# Altium PCB HeadController_1.PcbDoc
Units mm, origin at the board's own origin, x right, y up, seen from the top; angles counter-clockwise.
Board outline 67.02 x 26.21 mm, 2 copper layers (Top Layer, Bottom Layer), stack 1.051 mm thick; 73 components, 53 nets, 280 pads, 57 vias.
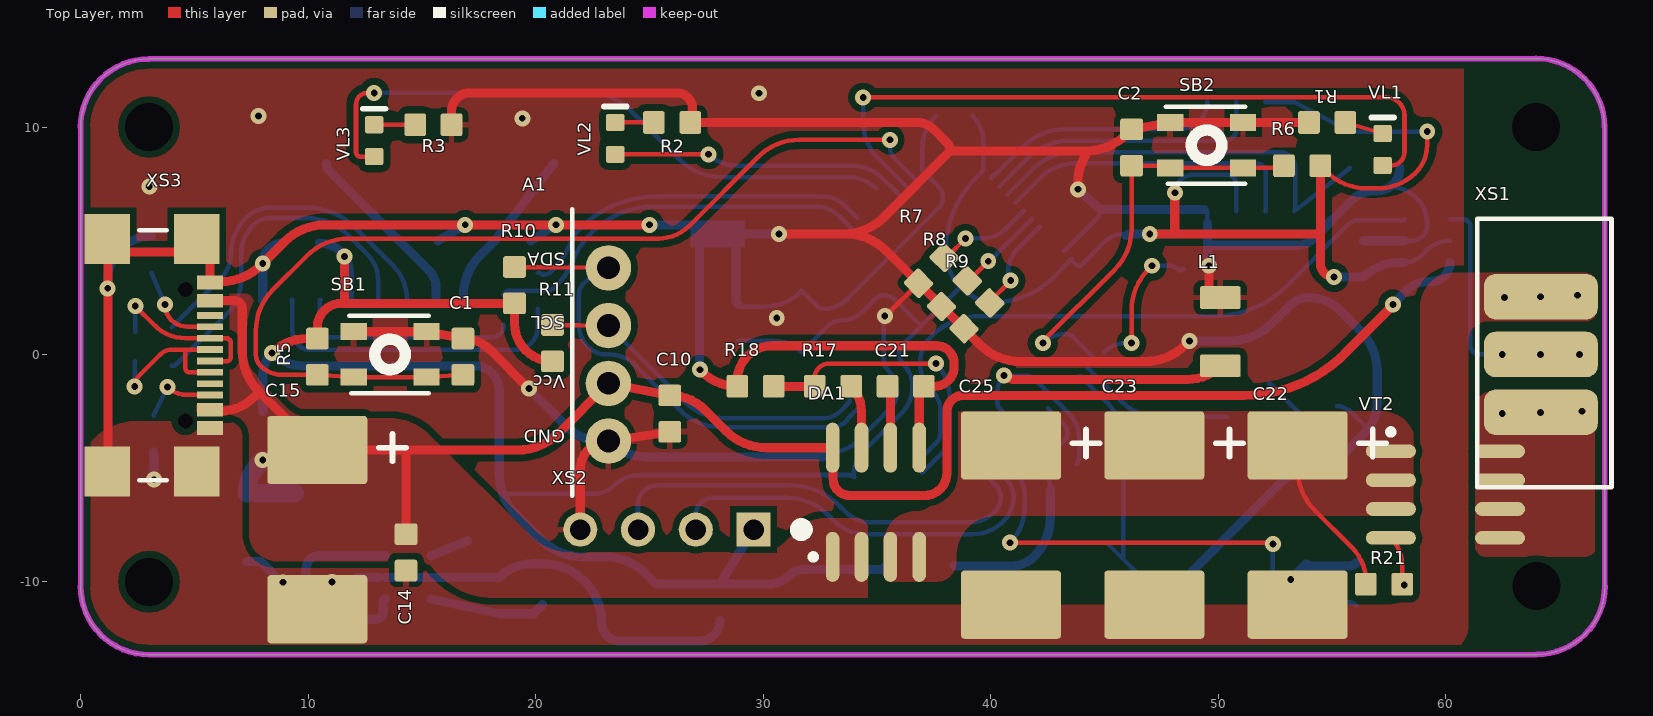
[diagram p0: Top Layer view]
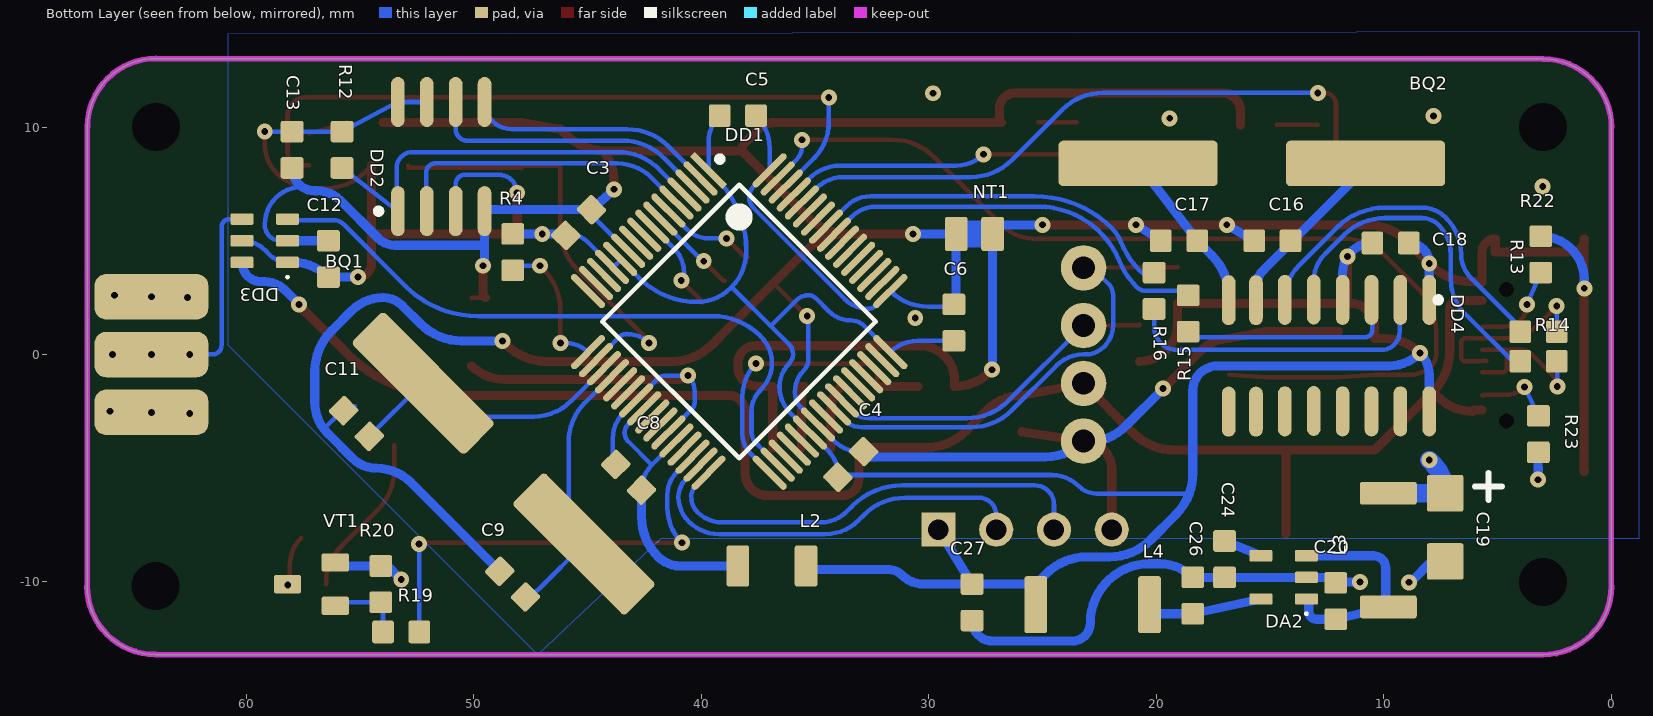
[diagram p1: Bottom Layer view, seen from below]
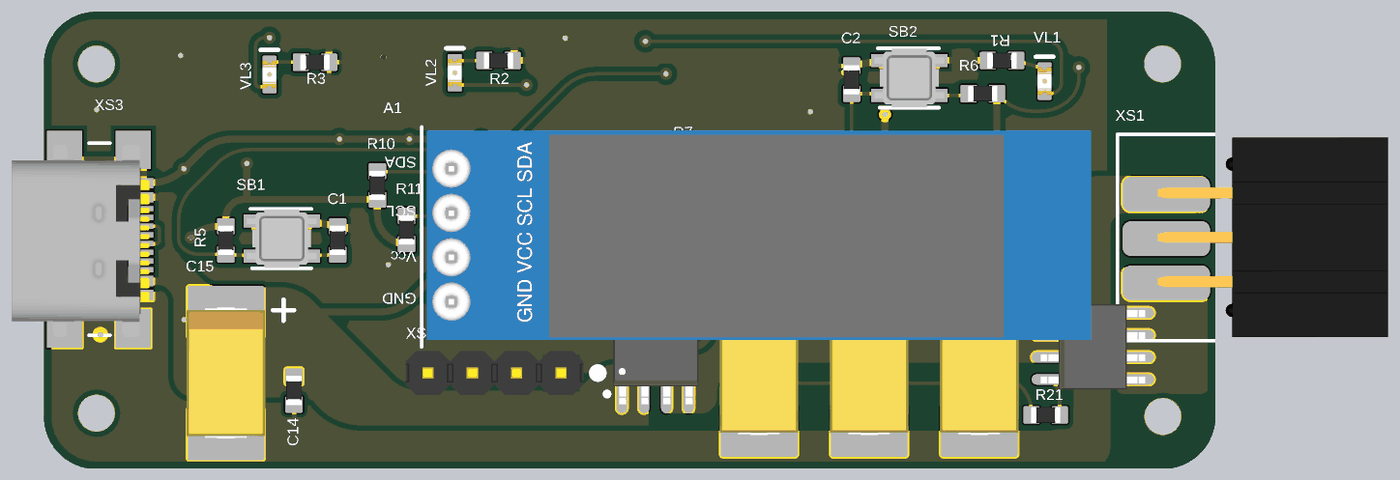
[diagram p2: 3D render of the assembled board from above, using the file's embedded part models]
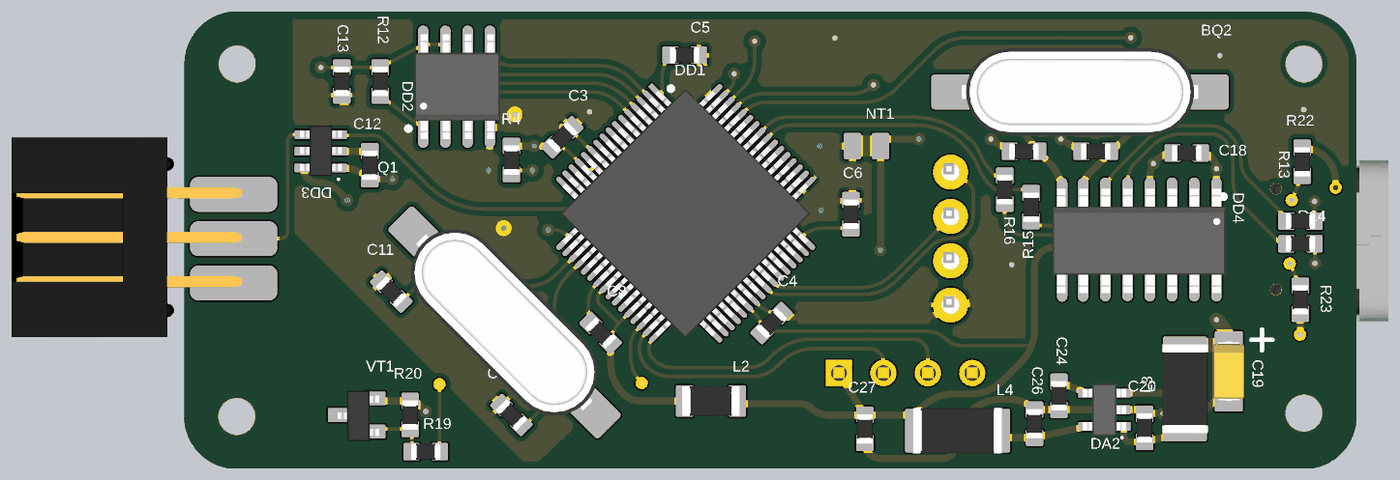
[diagram p3: 3D render of the assembled board from below, using the file's embedded part models]

## Layer stack, top to bottom
Top Solder: solder mask 0.0102, Solder Resist, Dk 3.5
Top Layer: signal copper 0.0356
Dielectric 1: dielectric 0.98, FR-4, Dk 4.8
Bottom Layer: signal copper 0.0356
Bottom Solder: solder mask 0.0102, Solder Resist, Dk 3.5

## Board outline
0,-10.191 0,9.985 -0.012,9.985 cw(c2.997,9.985) 2.997,12.994 2.997,13 63.985,13 63.985,13.012 cw(c63.985,10.003) 66.994,10.003 67,10.003 67,-10.185 67.012,-10.185 cw(c64.003,-10.185) 64.003,-13.194 63.997,-13.2 3,-13.2 cw(c3,-10.191)

## Design rules (kind name [scope] priority, off if disabled: settings)
Clearance [All] p1: gap=0.15 ignorepadtopadclearanceinfootprint=FALSE except(0.3: Arc-Poly Track-Poly SMDPad-Poly THPad-Poly Via-Poly Fill-Poly Poly-Poly)
DiffPairsRouting USB [All] p1: maxlimit=0.254 minlimit=0.2 mostfreqgap=0.254 toplayer_minwidth=0.2 toplayer_maxwidth=0.381 toplayer_prefwidth=0.381 bottomlayer_minwidth=0.2 bottomlayer_maxwidth=0.381 bottomlayer_prefwidth=0.381 maxuncoupledlength=12.7
PolygonConnect PolygonConnect_1 [InNet('NetVT2_3')] p1: connectstyle=Direct reliefconductorwidth=0.254 reliefentries=4 polygonreliefangle="90 Angle" airgapwidth=0.254
PolygonConnect NetC22_1 [InNet('NetC22_1')] p2: connectstyle=Direct reliefconductorwidth=0.254 reliefentries=4 polygonreliefangle="90 Angle" airgapwidth=0.254
PolygonConnect XS1 [HasFootprint('IDC-6 (2.54) (end face)')] p3: connectstyle=Direct reliefconductorwidth=0.254 reliefentries=4 polygonreliefangle="90 Angle" airgapwidth=0.254
PolygonConnect TECAP_D [HasFootprint('TANT_CAP_D(7343)')] p4: connectstyle=Direct reliefconductorwidth=0.254 reliefentries=4 polygonreliefangle="90 Angle" airgapwidth=0.254
PolygonConnect USB_C [HasFootprint('USB_C')] p5: connectstyle=Direct reliefconductorwidth=0.254 reliefentries=4 polygonreliefangle="90 Angle" airgapwidth=0.254
PolygonConnect OLED_VCC [InNet('OLED_VCC')] p6: connectstyle=Direct reliefconductorwidth=0.254 reliefentries=4 polygonreliefangle="90 Angle" airgapwidth=0.254
PolygonConnect [All] p7: thpad.connectstyle=Relief thpad.reliefconductorwidth=0.254 thpad.reliefentries=4 thpad.polygonreliefangle="90 Angle" thpad.airgapwidth=0.254 smdpad.connectstyle=Relief smdpad.reliefconductorwidth=0.254 smdpad.reliefentries=4 smdpad.polygonreliefangle="90 Angle" smdpad.airgapwidth=0.254 via.connectstyle=Direct via.reliefconductorwidth=0.254 via.reliefentries=4 via.polygonreliefangle="90 Angle" via.airgapwidth=0.254
RoutingVias [All] p1: holewidth=0.3 width=0.7 viastyle="Through Hole" minholewidth=0.3 minwidth=0.7 maxholewidth=0.3 maxwidth=0.7
SolderMaskExpansion [All] p1: expansion=0.102 istentingtop=FALSE
Width [All] p1: maxlimit=0.8 minlimit=0.2 preferedwidth=0.4
29 further rules are at their usual default settings.

## Classes and differential pairs
component class U_USB_UART: BQ2 C14 C15 C16 C17 C18 DD4 R13 R14 R15 R16 R22 R23 XS3
component class U_power: C19 C20 C21 C22 C23 C24 C25 C26 C27 DA1 DA2 L3 L4 R17 R18 R19 R20 R21 VT1 VT2
component class U_MCU: A1 BQ1 C1 C2 C3 C4 C5 C6 C8 C9 C10 C11 C12 C13 DD1 DD2 DD3 L1 L2 R1 R2 R3 R4 R5 R6 R7 R8 R9 R10 R11 R12 SB1 SB2 VL1 VL2 VL3 XS2
component class HeadController: NT1 XS1
differential pair USB: +NetDD4_5 -NetDD4_6

## Components (designator, comment, footprint, x,y, rotation, side; value= is the part's Value field where it differs from the comment)
A1 "OLED display 128x32" "OLED 128x32" 23.2,-3.81 r90 top locked
BQ1 "8МHz" BQ_HC49SM 48.7,-4.8 r45 bottom
BQ2 "12МHz" BQ_HC49SM 15.8,8.4 r0 bottom
C1 "0,1uF" SMD0603(1005) 16.8,-0.1 r90 top
C2 "0,1uF" SMD0603(1005) 46.2,9.1 r90 top
C3 "0,1uF" SMD0603(1005) 45.4,5.8 r315 bottom
C4 "0,1uF" SMD0603(1005) 33.434,-4.834 r315 bottom
C5 "0,1uF" SMD0603(1005) 38.4,10.5 r0 bottom
C6 "0,1uF" SMD0603(1005) 28.9,1.4 r270 bottom
C8 "0,1uF" SMD0603(1005) 43.2,-5.4 r225 bottom
C9 "15pF" SMD0603(1005) 48.3,-10.1 r225 bottom
C10 "1uF" SMD0603(1005) 25.9,-2.6 r90 top
C11 "15pF" SMD0603(1005) 55.166,-3.034 r225 bottom
C12 "0,1uF" SMD0603(1005) 56.4,4.2 r90 bottom
C13 "1uF" SMD0603(1005) 58,9 r270 bottom
C14 "0,1uF" SMD0603(1005) 14.3,-8.7 r90 top
C15 "100uF" TANT_CAP_D(7343) 10.4,-7.7 r270 top
C16 "22pF" SMD0603(1005) 14.9,5 r180 bottom
C17 "22pF" SMD0603(1005) 19,5 r180 bottom
C18 "0,1uF" SMD0603(1005) 9.7,4.9 r0 bottom
C19 "10uF x 10V" TANT_CAP_A(3216) 7.3,-7.6 r270 bottom
C20 "1uF" SMD0603(1005) 12.115,-10.842 r90 bottom
C21 "1n" SMD0603(1005) 36.27,-1.4 r0 top
C22 "100uF" TANT_CAP_D(7343) 53.5,-7.5 r270 top
C23 "100uF" TANT_CAP_D(7343) 47.2,-7.5 r270 top
C24 "10n" SMD0603(1005) 17,-9 r270 bottom
C25 "100uF" TANT_CAP_D(7343) 40.9,-7.5 r270 top
C26 "1uF" SMD0603(1005) 18.4,-10.6 r90 bottom
C27 "0,1uF" SMD0603(1005) 28.1,-10.9 r270 bottom
DA1 "ACS712" SOIC8 35,-6.5 r90 top
DA2 "LD3985M33R" SOT23-5 14.4,-9.8 r0 bottom
DD1 "MDR32F9Q2I" LQFP-64 38.344,1.447 r225 bottom
DD2 "AT25640B" SOIC8 51.4,8.7 r90 bottom
DD3 "К1156ЕУ5А" SOT23-6 59.2,5 r0 bottom
DD4 "CH340G" SOIC16 8,0 r270 bottom
L1 "10мкГн  10%" SMD1206(3216) 50.1,1 r270 top
L2 "10мкГн  10%" SMD1206(3216) 36.9,-9.3 r0 bottom
L3 "10мкГн  10%" SMD2010(5025) 9.8,-8.6 r270 bottom
L4 "10мкГн  10%" SMD2010(5025) 22.8,-11 r0 bottom
NT1 "=Value" NT 28,5.3 r180 bottom net-tie
R1 "470" SMD0603(1005) 54.8,10.2 r180 top
R2 "470" SMD0603(1005) 26,10.2 r0 top
R3 "470" SMD0603(1005) 15.5,10.1 r0 top
R4 "10k" SMD0603(1005) 48.3,4.5 r90 bottom
R5 "10k" SMD0603(1005) 10.4,-0.1 r90 top
R6 "10k" SMD0603(1005) 53.7,8.3 r0 top
R7 "10k" SMD0603(1005) 37.4,3.7 r45 top
R8 "10k" SMD0603(1005) 38.409,2.673 r45 top
R9 "10k" SMD0603(1005) 39.4,1.7 r45 top
R10 "5k" SMD0603(1005) 19.068,3.045 r90 top
R11 "5k" SMD0603(1005) 20.739,0.495 r90 top
R12 "10k" SMD0603(1005) 55.8,9 r90 bottom
R13 "=4,7" SMD0603(1005) 3.2,1 r0 bottom value=4,7
R14 "=4,7" SMD0603(1005) 3.2,-0.3 r0 bottom value=4,7
R15 "1k" SMD0603(1005) 18.6,1.8 r270 bottom
R16 "1k" SMD0603(1005) 20.1,2.8 r270 bottom
R17 "1k" SMD0603(1005) 33.07,-1.4 r180 top
R18 "1k" SMD0603(1005) 29.67,-1.4 r180 top
R19 "=4,7" SMD0603(1005) 53.2,-12.2 r0 bottom value=4,7
R20 "10k" SMD0603(1005) 54.1,-10.1 r90 bottom
R21 "10k" SMD0603(1005) 57.3,-10.1 r180 top
R22 "5k" SMD0603(1005) 3.1,4.4 r270 bottom
R23 "5k" SMD0603(1005) 3.2,-3.5 r90 bottom
SB1 "IT-1184" IT-1184 13.6,0 r0 top
SB2 "IT-1184" IT-1184 49.5,9.2 r0 top
VL1 "TO-1608BC-PG" LED_SMD0603(1005) 57.239,9.014 r90 top
VL2 "TO-1608BC-PG" LED_SMD0603(1005) 23.5,9.5 r90 top
VL3 "TO-1608BC-PG" LED_SMD0603(1005) 12.9,9.4 r90 top
VT1 "Value" SOT23-3 57.15,-10.1 r0 bottom
VT2 "IRF7416TRPBF" VT_SOIC8 60,-6.2 r0 top
XS1 "IDC6" "IDC-6 (2.54) (end face)" 67.7,-2.54 r90 top
XS2 "SWD conector PLS1x4" PLS1x4 29.58,-7.7 r270 top
XS3 "USB-C" USB_C 2.64,0 r0 top

## Footprints (in the part's own frame and the unit in brackets; to place one, negate y for a bottom-side part, rotate by r counter-clockwise, add the part's x,y. Pads: shape width x height; smd on the part's side, far side on the other; paste and mask are expansions set on the pad)
BQ_HC49SM [mm]
  rrect20% 7x2 smd: 1(-5,0) 2(5,0)
  body extent -6.75,-2.5 6.75,2.5, height 4.3
"IDC-6 (2.54) (end face)" [mm]
  rrect50% 2x5 smd: 1(0,3.5) 3(2.54,3.5) 5(5.08,3.5)
  rrect50% 2x5 smd far side: 2(-0.005,3.519) 4(2.535,3.519) 6(5.075,3.519)
  silkscreen extent -3.3,0.4 8.5,6.3, body extent -3.1,-9.17 8.33,4, height 4.83
IT-1184 [mm]
  rect 1.15x0.75 smd: 1(-1.6,1) 1(1.6,1) 2(-1.6,-1) 2(1.6,-1)
  silkscreen extent -1.8,-1.7 1.7,1.7, body extent -2,-1.67 2,1.68, height 1.5
LED_SMD0603(1005) [mm] "Chip Resistor, Body 0.6x0.3mm, IPC Medium Density"
  rrect20% 0.75x0.8 smd: 1(-0.7,0) 2(0.7,0)
  silkscreen extent 1.4,-0.5 1.4,0.5, body extent -0.8,-0.4 0.8,0.4, height 0.55
LQFP-64 [mm] "TSQFP, 64-Leads, Body 12,0x12,0mm (max), Pitch 0,50mm, IPC Low Density"
  rect 2x0.3 smd: 1(-5.65,3.75)
  oval 2x0.3 smd: 2(-5.65,3.25) 3(-5.65,2.75) 4(-5.65,2.25) 5(-5.65,1.75) 6(-5.65,1.25) 7(-5.65,0.75) 8(-5.65,0.25) 9(-5.65,-0.25) 10(-5.65,-0.75) 11(-5.65,-1.25) 12(-5.65,-1.75) 13(-5.65,-2.25) 14(-5.65,-2.75) 15(-5.65,-3.25) 16(-5.65,-3.75) 33(5.65,-3.75) 34(5.65,-3.25) 35(5.65,-2.75) 36(5.65,-2.25) 37(5.65,-1.75) 38(5.65,-1.25) 39(5.65,-0.75) 40(5.65,-0.25) 41(5.65,0.25) 42(5.65,0.75) 43(5.65,1.25) 44(5.65,1.75) 45(5.65,2.25) 46(5.65,2.75) 47(5.65,3.25) 48(5.65,3.75)
  oval 0.3x2 smd: 17(-3.75,-5.65) 18(-3.25,-5.65) 19(-2.75,-5.65) 20(-2.25,-5.65) 21(-1.75,-5.65) 22(-1.25,-5.65) 23(-0.75,-5.65) 24(-0.25,-5.65) 25(0.25,-5.65) 26(0.75,-5.65) 27(1.25,-5.65) 28(1.75,-5.65) 29(2.25,-5.65) 30(2.75,-5.65) 31(3.25,-5.65) 32(3.75,-5.65) 49(3.75,5.65) 50(3.25,5.65) 51(2.75,5.65) 52(2.25,5.65) 53(1.75,5.65) 54(1.25,5.65) 55(0.75,5.65) 56(0.25,5.65) 57(-0.25,5.65) 58(-0.75,5.65) 59(-1.25,5.65) 60(-1.75,5.65) 61(-2.25,5.65) 62(-2.75,5.65) 63(-3.25,5.65) 64(-3.75,5.65)
  silkscreen extent -5.77,-4.25 4.25,4.57, body extent -6.07,-6.1 6.07,6.05, height 1.63
NT [mm]
  rrect20% 1x1.5 smd: 1(-0.8,0) 2(0.8,0)
  Top Layer region: -1.2,0.6 1.2,0.6 1.2,-0.6 -1.2,-0.6
"OLED 128x32" [mm]
  round 2 hole 1: 1(0,0) 2(2.54,0) 3(5.08,0) 4(7.62,0)
  silkscreen extent -2.4,1.6 10.2,1.6, body extent -2,-36.7 10,1.3, height 5.5
PLS1x4 [mm]
  rect 1.5x1.5 hole 0.9: 1(0,0)
  round 1.5 hole 0.9: 2(0,-2.54) 3(0,-5.08) 4(0,-7.62)
  silkscreen extent -0.25,1.85 0.25,2.35, body extent -1.27,-8.89 1.27,1.27, height 8.6
SMD0603(1005) [mm] "Chip Resistor, Body 0.6x0.3mm, IPC Medium Density"
  rrect20% 0.95x1 smd: 1(-0.8,0) 2(0.8,0)
  body extent -0.85,-0.45 0.85,0.45, height 0.55
SMD1206(3216) [mm] "Chip Resistor, Body 0.6x0.3mm, IPC Medium Density"
  rrect20% 1x1.8 smd: 1(-1.5,0) 2(1.5,0)
  body extent -1.65,-0.85 1.65,0.85, height 0.65
SMD2010(5025) [mm] "Chip Resistor, Body 0.6x0.3mm, IPC Medium Density"
  rrect20% 1x2.5 smd: 1(-2.5,0) 2(2.5,0)
  body extent -2.55,-1.3 2.55,1.3, height 0.65
SOIC8 [mm]
  oval 2.2x0.6 smd: 1(-2.4,1.945) 2(-2.4,0.675) 3(-2.4,-0.595) 4(-2.4,-1.865) 5(2.4,-1.865) 6(2.4,-0.595) 7(2.4,0.675) 8(2.4,1.945)
  silkscreen extent -2.52,2.67 -2.28,2.92, body extent -2.99,-2.45 2.99,2.45, height 1.35
SOIC16 [mm]
  oval 2.2x0.6 smd: 1(-2.4,0) 2(-2.4,-1.27) 3(-2.4,-2.54) 4(-2.4,-3.81) 5(-2.418,-5.08) 6(-2.4,-6.35) 7(-2.384,-7.62) 8(-2.384,-8.82) 9(2.516,-8.82) 10(2.516,-7.62) 11(2.5,-6.35) 12(2.482,-5.08) 13(2.5,-3.81) 14(2.5,-2.54) 15(2.5,-1.27) 16(2.5,0)
  silkscreen extent -2.52,0.27 -2.28,0.52, body extent -2.86,-9.37 3.12,0.53, height 1.35
SOT23-3 [mm]
  rrect20% 1.2x0.8 smd: 1(-1.05,0.95) 2(-1.05,-0.95) 3(1.05,0)
  body extent -1.3,-1.4 1.1,1.5, height 1
SOT23-5 [mm]
  rrect20% 1x0.5 smd: 1(-1,0.95) 2(-1,0) 3(-1,-0.95) 4(1,-0.95) 5(1,0.95)
  silkscreen extent -1.05,1.55 -0.95,1.65, body extent -1.25,-1.5 1.25,1.5, height 1.1
SOT23-6 [mm]
  rrect20% 1x0.5 smd: 1(-1,0.95) 2(-1,0) 3(-1,-0.95) 4(1,-0.95) 5(1,0) 6(1,0.95)
  silkscreen extent -1.05,1.55 -0.95,1.65, body extent -1.21,-1.48 1.19,1.42, height 1
TANT_CAP_A(3216) [mm]
  rrect10% 1.6x1.6 smd: 1(-1.5,0) 2(1.5,0)
  silkscreen extent -2.4,1.3 -1.2,2.5, body extent -1.7,-0.9 1.7,0.9, height 1.8
TANT_CAP_D(7343) [mm]
  rrect10% 3x4.4 smd: 1(-3.5,0) 2(3.5,0)
  silkscreen extent -4.2,2.7 -3,3.9, body extent -3.75,-2.25 3.75,2.25, height 3.1
USB_C [mm]
  round 0 hole 0.65: 0(1.96,-2.925) 0(1.96,2.855)
  rect 2x2.2 smd: 1(-1.47,-5.145) 1(-1.47,5.075) 1(2.46,-5.145) 1(2.46,5.075)
  rect 1.15x0.6 smd: 1(3.035,3.165) 2(3.035,2.365) 11(3.035,-2.435) 12(3.035,-3.235)
  rect 1.15x0.3 smd: 3(3.035,1.715) 4(3.035,1.215) 5(3.035,0.715) 6(3.035,0.215) 7(3.035,-0.285) 8(3.035,-0.785) 9(3.035,-1.285) 10(3.035,-1.785)
  silkscreen extent -0.07,-5.53 1.13,5.47, body extent -4.47,-5.63 3.38,5.37, height 3.2
VT_SOIC8 [mm]
  oval 2.2x0.6 smd: 1(-2.4,-0.595) 1(-2.4,0.675) 1(-2.4,1.945) 2(-2.4,-1.865) 3(2.4,-1.865) 3(2.4,-0.595) 3(2.4,0.675) 3(2.4,1.945)
  silkscreen extent -2.52,2.67 -2.27,2.92, body extent -2.99,-2.45 2.99,2.45, height 1.35

## Part data
A1: library part "Дисплей OLED 128x32", Package=4x2,54mm, Type=A, ValueBOM="Дисплей OLED 128x32"
BQ1: Package=HC49SM, ValueBOM="Кварцевый резонатор 8МГц HC49S", Type=BQ
BQ2: Package=HC49SM, ValueBOM="Кварцевый резонатор 12МГц HC49S", Type=BQ
C1 C2 C3 C4 C5 C6 C8 C12 C14 C18 C27: Package=SMD0603, ValueBOM="Конденсатор керамический 0,1мкФ SMD 0603 1%", Type=C
C9 C11: Package=SMD0603, ValueBOM="Конденсатор керамический 15пФ SMD 0603 1%", Type=C
C10 C13 C20 C26: Package=SMD0603, ValueBOM="Конденсатор керамический 1мкФ SMD 0603 1%", Type=C
C15 C22 C23 C25: Package="SMD D", ValueBOM="Конденсатор танталовый 100мкФ х 16В 10%  SMD D", Type=C
C16 C17: Package=SMD0603, ValueBOM="Конденсатор керамический 22пФ SMD 0603 1%", Type=C
C19: Package="SMD A", ValueBOM="Конденсатор танталовый 10мкФ х 10В SMD A", Type=C
C21: library part CER_CUP_0603, Package=SMD0603, ValueBOM="Конденсатор керамический 1нФ х 50В SMD 0603 1%", Type=C
C24: library part CER_CUP_0603, Package=SMD0603, ValueBOM="Конденсатор керамический 10нФ х 50В SMD 0603 1%", Type=C
DA1: library part "Микросхема ACS712", Type=DA, ValueBOM="Микросхема ACS712"
DA2: Package=SOT-23-5, ValueBOM="Микросхема LD3985M33R, SOT-23-5", Type=DA
DD1: Package=LQFP64, ValueBOM="Микроконтроллер MDR32F9Q2I (К1986ВЕ92QI) LQFP64", Type=DD
DD2: library part "Микросхема AT25640B", Package=SOIC-8, ValueBOM="Микросхема EEPROM AT25640B", Type=DD
DD3: library part "Микросхема SN74LVC1T45DBVR", "1-битный шинный приемопередатчик с двуполярным питанием, тремя состояниями на выходе", Package=SOT-23-6, ValueBOM="Микросхема К1156ЕУ5А", Type=DD
DD4: library part "Микросхема CH340G", Package=SOIC-8, Type=DD, ValueBOM="Микросхема CH340G"
L1 L2: library part L1, Package=SMD1206, ValueBOM="Индуктивность 10 мкГн, SMD1206, 10%", Type=L
L3 L4: library part L1, Package=SMD1812, ValueBOM="Индуктивность B82432-C1103-K, 10 мкГн, SMD1812, 10%", Type=L
R1 R2 R3: Package=SMD0603, ValueBOM="Резистор 470 Ом SMD 0603 1%", Type=R
R4 R5 R6 R7 R8 R9 R12 R20 R21: Package=SMD0603, ValueBOM="Резистор 10кОм SMD 0603 1%", Type=R
R10 R11 R22 R23: Package=SMD0603, ValueBOM="Резистор 5кОм SMD 0603 1%", Type=R
R13 R14 R19: Package=SMD0603, ValueBOM="Резистор 4,7Ом SMD 0603 1%", Type=R
R15 R16 R17 R18: Package=SMD0603, ValueBOM="Резистор 1кОм SMD 0603 1%", Type=R
SB1 SB2: library part "Кнопка тактовая (универсальная)", Package="SMD 3.3x3.3x1.5", ValueBOM="Кнопка тактовая IT1184", Type=SB
VL1 VL2 VL3: Package=SMD0603, ValueBOM="Светодиод зелёный TO-1608BC-PG SMD0603", Light=Зелёный, Type=VL
VT1: library part VT_N_MOSFET_SOT23_3, Package=SOT-23, ValueBOM="Транзистор n-МОП Value SOT23", Type=VT
VT2: library part "Транзистор IRF7416TRPBF", Package=SOIC-8, ValueBOM="Транзистор p-МОП IRF7416TRPBF, SOIC-8", Type=VT
XS1: Package=2,54mm, ValueBOM="Разъём IDC6 прямой", Type=XS
XS2: library part PLS1x4, Package=2,54mm, ValueBOM="Разъём PLS1x4 прямой", Type=XS
XS3: library part USB_C, Package="12 pin", ValueBOM="Разъём USB type C 12 контактный", Link=https://www.voltmaster-samara.ru/upload/iblock/68a/68a6841d20080b30588d6f36d0bc1a38.pdf, Type=XS

## Free pads (board coordinates)
  round 1.524 hole 2.1: 21(3,-10) 21(3,10) 21(63.985,10.003) 21(64.003,-10.185)

## Via types
v1: diameter 0.7, hole 0.3, Top Layer to Bottom Layer, tented both sides, 49 vias
v2: diameter 0.7, hole 0.3, Top Layer to Bottom Layer, 8 vias

## Nets (pads, with @x,y where several pads share a name; then routed paths per layer and width w, separated by ;. In a path a pad name is that pad's centre, name@x,y a point inside that pad or via, vN(x,y) a via of type N, cw(c..) or ccw(c..) an arc to the next point about the centre after c; other vN are vias at no path point)
button: C1.1 DD1.63 R5.1 SB1.2 | length 44.3
  Top Layer w0.2: C1.1 15.2,-1 12,-1 R5.1 8.866,-0.9 cw(c8.866,0.466) 7.9,-0.5 cw(c8.383,-0.017) 7.7,-0.017 7.7,1.048 cw(c10.24,1.048) 8.444,2.844 9.944,4.344 cw(c11.762,2.526) 11.762,5.097 25.4,5.097 ccw(c25.4,7.022) 26.761,5.661 29.793,8.693 cw(c31.589,6.897) 31.589,9.437 v1(35.578,9.437)
  Bottom Layer w0.2: v1(35.578,9.437) 35.578,9.149 ccw(c36.399,9.149) 35.818,8.568 DD1.63
CS: DD1.4 DD2.1 R12.1 | length 18.7
  Bottom Layer w0.2: DD1.4 41.871,8.156 cw(c43.667,6.36) 43.667,8.9 52.7,8.9 cw(c52.7,8.2) 53.4,8.2 53.4,6.355 cw(c53.345,6.355) DD2.1@53.398,6.341 ; DD2.1 DD2.1@53.398,6.341 ; R12.1 DD2.1@53.398,6.341
DATA: DD1.34 DD3.3 | length 30
  Bottom Layer w0.2: DD1.34@37.317,-4.183 36.654,-4.846 DD1.34 37.314,-4.179 37.595,-3.898 ccw(c37.101,-3.403) 37.8,-3.403 37.8,-2.472 ccw(c36.643,-2.472) 37.712,-2.03 ccw(c36.293,-2.617) 37.379,-1.531 cw(c38.528,-0.383) 36.903,-0.383 cw(c38.559,-0.383) 37.388,0.788 37.415,0.815 cw(c39.518,-1.288) 39.518,1.686 49.834,1.686 ccw(c49.834,6.176) 53.009,3.001 55.734,5.727 cw(c56.152,5.309) 56.152,5.9 58.079,5.9 ccw(c58.079,6.071) DD3.3
GND: C14.1 C15.2 C16.1 C17.1 C18.1 C19.2 C20.2 C21.2 C22.2 C23.2 C24.2 C25.2 C26.2 C27.2 DA1.5 DA2.2 DD4.1 NT1.2 R18.2 R20.2 R22.1 R23.1 VT1.2 XS1.5 XS1.6 XS3.1 XS3.12 | length 98.6
  Top Layer w0.4: XS3.1@1.17,-5.145 ccw(c1.17,-5.115) 1.2,-5.115 XS3.1@1.2,4.892 ; v1@24.801,5.7 v1(20.9,5.7) v1(16.9,5.7) 10.752,5.7 ccw(c10.752,3.16) 8.956,4.956 v1(8,4) 7.944,3.944 cw(c6.148,5.74) 6.148,3.2 5.9,3.2 cw(c5.816,3.284) 5.816,3.165 5.675,3.165 5.675,4.5 ccw(c5.1,4.5) 5.1,5.075 5.1,4.5 1.745,4.5 cw(c1.745,5.075) XS3.1@1.2,4.892 ; v1(27.222,-0.67) 27.222,-0.683 27.282,-0.742 ccw(c28.87,0.846) R18.2 28.87,-1.13 cw(c30.384,-1.13) 30.384,0.384 37.616,0.384 cw(c37.616,-0.4) 38.4,-0.4 38.4,-0.539 cw(c37.539,-0.539) 37.539,-1.4 C21.2 36.865,-1.4 DA1.5 ; XS3.1@1.2,4.892 cw(c1.745,5.075) 1.17,5.075 cw(c1.17,5.045) 1.2,5.045 XS3.1@1.2,4.892
  Bottom Layer w0.4: v2(1.184,2.908) 1.184,3.284 cw(c3.1,3.284) R22.1 ; R23.1 3.22,-4.398 3.207,-5.451 3.221,-5.465 v2(3.221,-5.506) ; C19.2 7.9,-9.1 8.818,-10.018 v1(8.892,-10.018) ; DD4.1 v1(8,4) cw(c8.9,4) C18.1 ; v1(11.051,-10.009) 12.082,-10.009 cw(c12.082,-10.042) C20.2 ; C20.2@12.115,-9.8 DA2.2@13.1,-9.8 ; DA2.2 C24.2 C26.2 cw(c19.849,-11.249) 19.849,-9.2 20.3,-9.2 cw(c20.3,-11.8) 22.9,-11.8 ccw(c23.7,-11.8) 23.7,-12.6 27.2,-12.6 ccw(c27.2,-11.7) C27.2 ; C16.1 v1(16.9,5.7) ; C17.1 v1(20.9,5.7) ; v1(25,5.7) 27.2,5.7 NT1.2 27.2,-0.616 ccw(c27.276,-0.616) v1(27.222,-0.67) ; v1(53.2,-9.9) 53.888,-9.212 ccw(c54.1,-9) R20.2 55.738,-9.3 ccw(c55.738,-8.788) VT1.2
  other v1: 62.6,2.5 64.181,2.535 65.8,2.6
I_MES: DD1.33 R17.2 R18.1 | length 13.3
  Top Layer w0.2: R17.2 32.27,-1.03 cw(c32.9,-1.03) 32.9,-0.4 v1(37.6,-0.4) v1@37.648,-0.4
  Top Layer w0.4: R18.1 R17.2
  Bottom Layer w0.2: DD1.33 37.85,-4.35 ccw(c37.005,-3.505) 38.2,-3.505 38.2,-1.849 ccw(c36.151,-1.849) v1(37.6,-0.4)
LED1: DD1.62 VL1.1 | length 31.8
  Top Layer w0.2: v1(34.4,11.3) 57.4,11.3 cw(c57.4,10.5) 58.2,10.5 58.2,8.9 cw(c57.614,8.9) 57.614,8.314 VL1.1
  Bottom Layer w0.2: v1(34.4,11.3) 34.4,10.2 ccw(c36.623,10.2) 35.051,8.628 DD1.62
LED2: DD1.61 VL2.1 | length 13
  Top Layer w0.2: VL2.1 v1(27.6,8.8)
  Bottom Layer w0.2: v1(27.6,8.8) ccw(c28.807,10.007) 28.807,8.3 33.9,8.3 cw(c33.9,6.369) 35.266,7.734 35.92,7.08 cw(c35.872,7.033) DD1.61
LED3: DD1.60 VL3.1 | length 27.6
  Top Layer w0.2: VL3.1 12.3,8.7 cw(c12.3,8.9) 12.1,8.9 12.1,11 cw(c12.6,11) 12.6,11.5 v1(12.9,11.5)
  Bottom Layer w0.2: v1(12.9,11.5) 22.348,11.5 cw(c22.348,8.96) 24.144,10.756 26.356,8.544 ccw(c28.152,10.34) 28.152,7.8 33.734,7.8 cw(c33.734,6.036) DD1.60@34.982,7.283
MATRIX_ON: DD1.30 R19.1 | length 19.8
  Top Layer w0.2: v2@40.883,-8.3 v2(40.858,-8.275) 52.258,-8.275 cw(c52.258,-8.497) v2(52.415,-8.34)
  Bottom Layer w0.2: DD1.30 DD1.30@41.1,-5.2 ; v2(40.858,-8.275) ccw(c39.307,-6.725) 41.5,-6.725 41.5,-6.166 ccw(c40.134,-6.166) DD1.30@41.1,-5.2 ; R19.1 52.415,-12.185 v2(52.415,-8.34)
MCU_AGND: C8.1 DD1.23 DD1.27 L1.2 | length 18.8
  Top Layer w0.4: v1(40.594,-0.927) 40.6,-0.921 40.6,-0.9 ccw(c41.083,-0.417) 41.083,-1.1 48.651,-1.1 ccw(c48.651,0.949) L1.2
  Bottom Layer w0.2: v1(40.594,-0.927) 40.6,-0.927 41.582,-0.927 cw(c41.582,-1.399) 41.916,-1.065 DD1.23 43.44,-2.589 cw(c42.328,-3.7) 43.9,-3.7 43.9,-4.51 cw(c43.441,-4.51) C8.1 ; v1@40.6,-0.9 ccw(c41.324,-1.624) 40.3,-1.624 40.3,-2.1 ccw(c40.728,-2.1) 40.425,-2.403 DD1.27
  Bottom Layer w0.4: v1(40.594,-0.927) 40.6,-0.921 v1@40.6,-0.9
MCU_AVCC: C8.2 DD1.24 DD1.28 L2.2 | length 12.8
  Bottom Layer w0.2: DD1.28 42.177,-4.862 ; DD1.24 43.241,-3.097 cw(c42.898,-3.44) 43.383,-3.44 cw(c42.865,-3.44) 43.232,-3.807 42.177,-4.862 ; C8.2 ccw(c41.073,-5.966) 42.177,-4.862
  Bottom Layer w0.4: L2.2 40.934,-9.3 ccw(c40.934,-7.934) 41.9,-8.9 ccw(c40.127,-7.127) 42.634,-7.127 C8.2
MCU_GND: A1.1 C1.2 C2.2 C3.1 C4.1 C5.1 C6.1 C9.1 C10.1 C11.1 C12.2 C13.2 DD1.11 DD1.39 DD1.49 DD1.64 DD2.4 DD3.2 L1.1 NT1.1 R1.2 R2.2 R3.2 R7.1 R8.1 R9.1 SB1.1 SB2.1 XS2.4 | length 183.9
  Top Layer w0.2: v1@35.373,1.673 R7.1 ; L1.1@49.5,2.5 L1.1
  Top Layer w0.4: SB1.1@12,1 15.2,1 C1.2 cw(c16.8,-0.99) 17.995,0.205 v1(19.7,-1.5) ; R3.2 16.3,10.7 cw(c17.1,10.7) 17.1,11.5 26.2,11.5 cw(c26.2,10.8) 26.9,10.8 26.9,10.3 cw(c26.8,10.3) R2.2 36.776,10.2 cw(c36.776,9.176) 37.5,9.9 38.082,9.318 cw(c37.712,8.948) 38.235,8.948 ; XS2.4 21.96,-5.05 cw(c23.2,-5.05) A1.1 C10.1 ; v1(30.7,5.3) 33.535,5.3 ; v1(43.839,7.261) 43.839,7.539 cw(c46.2,7.539) 44.307,8.95 ; v2(48.743,0.596) 48.579,0.431 cw(c46.783,2.228) 46.783,-0.312 41.333,-0.312 cw(c41.333,2.228) 39.537,0.431 R9.1 R7.1 35.413,4.556 ccw(c33.617,2.76) 33.617,5.3 33.535,5.3 ; L1.1@49.5,2.5 ccw(c49.259,2.741) 49.6,2.741 v1(49.6,3.9) ; R1.2 51.1,10.2 47.9,10.2 C2.2 45.992,9.692 cw(c44.196,11.488) 44.307,8.95 ; 33.535,5.3 ccw(c33.535,7.84) 35.331,6.044 38.235,8.948 ; 38.235,8.948 44.196,8.948 ccw(c44.196,11.488) 44.307,8.95
  Bottom Layer w0.2: C6.1 28.9,2.1 30.03,2.1 ccw(c30.03,4.457) DD1.49 32.351,2.136 ccw(c32.666,2.451) 32.666,2.006 ccw(c32.666,3.474) 33.516,2.277 ccw(c32.666,3.474) 33.704,2.436 37.71,6.442 ccw(c37.253,6.9) 37.9,6.9 ccw(c37.176,6.9) 37.688,7.412 37.4,7.7 37.394,7.7 DD1.64 37,9.051 cw(c39.049,9.051) C5.1 ; C4.1 32.94,-4.298 ccw(c32.94,-2.519) 34.039,-3.919 DD1.39 35.615,-2.343 ccw(c34.934,-1.662) 35.897,-1.662 35.897,-1.658 ccw(c34.542,-1.658) 35.5,-0.7 cw(c35.983,-0.217) 35.3,-0.217 35.3,1.575 cw(c35.471,1.575) v1(35.35,1.696) ; DD1.11 ccw(c43.223,4.644) 43.283,4.583 44.671,5.971 ccw(c44.276,6.366) C3.1 ; DD2.4@49.377,6.366 cw(c49.377,6.142) DD2.4 DD2.4@49.535,5.768 ; C11.1@55.249,-2.269 cw(c55.249,-2.951) C11.1 ; C11.1@55.731,-2.424 55.745,-2.437 ccw(c55.776,-2.469) C11.1 ; 56.6,-3.277 55.835,-2.511 ccw(c55.731,-2.614) C11.1 ; 57.555,7.368 cw(c57.555,5.723) 59.2,5.723 59.2,5.7 cw(c58.5,5.7) 58.5,5 DD3.2
  Bottom Layer w0.4: v1(19.7,-1.5) 21.332,-3.132 ccw(c23.128,-1.336) A1.1@23.128,-3.876 ; A1.1 ccw(c24.866,-2.144) 24.866,-4.5 32.602,-4.5 32.844,-4.258 cw(c32.844,-4.294) C4.1 ; C6.1 cw(c29.141,2.441) 28.8,2.441 NT1.1 v1(30.7,5.3) ; v1(43.839,7.261) C3.1 DD2.4@49.377,6.366 ; v2(48.743,0.596) 50.544,0.596 ccw(c50.544,3.136) 52.34,1.34 53.146,2.146 cw(c54,1.293) 54,2.5 cw(c54,0.569) 55.366,1.934 56.256,1.044 cw(c54.46,-0.752) 57,-0.752 57,-2.1 cw(c55.069,-2.1) 56.6,-3.277 cw(c55.069,-2.1) 56.434,-3.466 55.324,-4.576 cw(c54.3,-3.551) 54.3,-5 ccw(c54.3,-7.173) 52.764,-5.636 C9.1 ; DD2.4@49.535,5.768 49.535,4.8 ; v1(49.6,3.9) cw(c49.757,4.057) 49.535,4.057 49.535,4.8 ; C12.2 DD3.2 ; C13.2 cw(c57,8.2) 57.555,7.368 cw(c57,8.2) 57,7.2 56.9,7.2 ccw(c56.9,5.751) 55.876,6.776 54.2,5.1 cw(c53.476,5.824) 53.476,4.8 49.535,4.8
  other v1: 30.6,1.6 3.012,7.384 19.412,10.384 7.812,10.484 29.812,11.484
MCU_VCC: C3.2 C4.2 C5.2 C6.2 C12.1 C13.1 C18.2 C27.1 DD1.1 DD1.12 DD1.13 DD1.38 DD1.48 DD2.3 DD2.7 DD2.8 DD3.1 DD3.5 DD4.4 DD4.16 L2.1 L4.2 R4.2 R5.2 R6.2 R10.1 R11.1 R12.2 XS2.1 | length 154.4
  Top Layer w0.2: R6.2 54.756,8.044 ccw(c56.552,9.84) 56.552,7.3 57.01,7.3 ccw(c57.01,9.69) 58.7,8 ccw(c57.493,9.207) 59.2,9.207 v1(59.2,9.8)
  Top Layer w0.4: v1@8.484,0.095 v1(8.404,0.062) cw(c9.945,-1.479) 9.945,0.7 R5.2 10.4,1.2 cw(c11.445,1.2) 11.445,2.245 11.6,2.245 ; v1(11.6,4.3) 11.6,2.245 ; R11.1 cw(c20.739,1.366) 19.068,1.366 R10.1 11.6,2.245 ; v1(47,5.3) 48.1,5.3 ; v2(48.111,7.11) ccw(c48.136,7.085) 48.1,7.085 48.1,5.3 ; R6.2 54.5,5.3 ; v1(55.1,3.4) cw(c55.1,4) 54.5,4 54.5,5.3 ; 48.1,5.3 54.5,5.3
  Bottom Layer w0.2: 18.553,-6.117 22.635,-6.117 ccw(c22.635,-5.035) 23.4,-5.8 cw(c24.607,-7.007) 24.607,-5.3 33.759,-5.3 cw(c33.759,-5.641) C4.2 ccw(c33.911,-5.4) 33.974,-5.337 cw(c35.535,-5.337) 34.431,-4.233 DD1.38 36.088,-2.577 ccw(c34.928,-1.417) 36.568,-1.417 ccw(c35.139,-1.417) 36.15,-0.406 cw(c36.578,0.022) 36.113,-0.366 ccw(c34.142,-1.385) 36.01,-0.187 cw(c36.578,0.022) 36.15,0.45 36.95,1.25 ; C6.2 30.498,0.6 cw(c30.498,-1.096) DD1.48 32.852,1.259 cw(c33.434,0.677) 33.434,1.5 ccw(c33.434,2.866) 34.4,1.9 34.959,2.459 cw(c35.3,2.117) 35.3,2.6 35.317,2.6 cw(c35.317,1.917) 35.8,2.4 36.95,1.25 ; C5.2 cw(c38.024,9.324) 39.687,9.324 DD1.1 39.353,7.76 ccw(c42.556,4.557) 38.027,4.557 ccw(c40.332,4.557) 38.702,2.927 ; C3.2 cw(c45.966,5.429) 45.828,5.291 ccw(c45.828,4.136) 45.012,4.953 43.944,3.885 cw(c43.944,4.196) 43.724,3.976 43.633,4.067 cw(c43.771,4.205) DD1.12 42.732,3.36 cw(c40.194,5.897) 40.194,2.309 cw(c40.194,4.42) 38.702,2.927 ; v2(48.111,7.11) cw(c48.9,7.11) 48.9,7.9 50.4,7.9 cw(c50.4,7.5) 50.8,7.5 50.8,6.3 DD2.3 ; DD2.7 DD2.8 R12.2 C13.1 v1(59.2,9.8) ; DD3.1 ccw(c58.2,5.136) 58.968,4.368 59.176,4.576 cw(c60.2,3.551) DD3.5 ; 36.95,1.25 38.575,2.875 cw(c38.702,2.748) 38.702,2.927
  Bottom Layer w0.4: DD4.16 8,-0.914 cw(c9.379,-0.914) v1(8.404,0.062) ccw(c9.76,1.418) 9.76,-0.5 17.3,-0.5 cw(c17.3,-1.6) 18.4,-1.6 18.4,-5.248 ccw(c20.94,-5.248) 18.553,-6.117 ccw(c20.94,-5.248) 19.144,-7.044 20.256,-8.156 ccw(c22.052,-6.36) 22.052,-8.9 23.048,-8.9 cw(c23.048,-11.44) 24.844,-9.644 25.3,-10.1 C27.1 ; C18.2 cw(c10.5,3.59) 11.81,3.59 DD4.4 ; XS2.1 C27.1 ; L2.1 35.238,-9.462 31.74,-9.462 ccw(c31.74,-10.223) 31.203,-9.685 cw(c30.201,-8.684) 30.201,-10.1 C27.1 ; C3.2 cw(c46.124,5.076) 46.124,5.3 v1(47,5.3) R4.2 ; v1(55.1,3.4) C12.1 cw(c57.969,1.831) 57.969,4.05 DD3.1
MISO: DD1.5 DD2.2 | length 13.6
  Bottom Layer w0.2: DD1.5 42.201,7.779 cw(c43.7,6.28) 43.7,8.4 51.7,8.4 cw(c51.7,8) 52.1,8 52.1,6.325 cw(c52.075,6.325) DD2.2
MODE0: DD1.6 R7.2 | length 4.3
  Top Layer w0.2: R7.2 ccw(c37.966,4.507) 38.136,4.336 v1(38.9,5.1)
  Bottom Layer w0.2: v1(38.9,5.1) 39.681,5.1 ccw(c39.681,6.423) 40.616,5.488 DD1.6
MODE1: DD1.7 R8.2 | length 4
  Top Layer w0.2: R8.2 ccw(c38.975,3.392) R8.2@39.083,3.283 ; R8.2@39.083,3.283 v1(39.9,4.1)
  Bottom Layer w0.2: v1(39.9,4.1) 39.95,4.1 41.755,5.905 41.763,5.863 ccw(c41.654,5.972) DD1.7
MOSI: DD1.2 DD2.5 | length 11.2
  Bottom Layer w0.2: DD1.2@40.2,7.9 ccw(c40.2,7.741) 40.041,7.741 41.457,9.156 cw(c43.253,7.36) 43.253,9.9 48.335,9.9 ccw(c48.335,11.1) DD2.5
NetBQ2_1: BQ2.1 C16.2 DD4.7 | length 7.9
  Bottom Layer w0.4: BQ2.1 ccw(c11.283,8.4) 10.941,8.059 15.3,3.7 cw(c14.527,2.927) 15.62,2.927 DD4.7
NetBQ2_2: BQ2.2 C17.2 DD4.8 | length 7.4
  Bottom Layer w0.4: DD4.8 16.82,2.568 cw(c19.36,2.568) 17.564,4.364 C17.2 BQ2.2
NetC20_1: C20.1 DA2.1 DA2.3 L3.2 | length 9.9
  Bottom Layer w0.4: DA2.1 ccw(c13.4,-10.85) 13.3,-10.85 13.3,-11.3 cw(c12.958,-11.3) 12.958,-11.642 C20.1 L3.2 9.913,-10.987 9.913,-9.387 cw(c10.45,-9.387) 10.45,-8.85 DA2.3
NetC21_1: C21.1 DA1.6 | length 2.8
  Top Layer w0.4: C21.1 35.595,-1.4 DA1.6
NetC22_1: C22.1 C23.1 C25.1 DA1.3 DA1.4 R21.2 VT2.1 | length 7.1
  Top Layer w0.2: C22.1 53.5,-5.048 ccw(c56.04,-5.048) 54.244,-6.844 55.9,-8.5 cw(c54.451,-9.949) 56.5,-9.949 R21.2
NetC24_1: C24.1 DA2.4 | length 1.7
  Bottom Layer w0.4: DA2.4 C24.1
NetC26_1: C26.1 DA2.5 L4.1 | length 5.1
  Bottom Layer w0.4: DA2.5 C26.1 19.9,-11.4 L4.1
NetDA1_7: DA1.7 R17.1 | length 2.8
  Top Layer w0.4: R17.1 cw(c32.772,-2.498) 34.325,-2.498 DA1.7
NetDD3_4: DD3.4 XS1.3 XS1.4 | length 9.7
  Top Layer w0.2: XS1.3@64.15,-0.05 ccw(c64.15,0) XS1.3
  Bottom Layer w0.2: DD3.4 60.75,5.95 cw(c60.75,5.6) 61.1,5.6 61.1,0.4 ccw(c61.5,0.4) 61.5,0 v1(64.181,0) XS1.4
  other v1: 62.5,0 65.9,0
NetDD4_2: DD4.2 R16.2 | length 14
  Bottom Layer w0.2: DD4.2 cw(c9.27,2.37) 9.3,2.37 9.3,1 ccw(c10.1,1) 10.1,0.2 19.08,0.2 ccw(c19.08,1.22) 20.1,1.22 R16.2
NetDD4_3: DD4.3 R15.2 | length 9.9
  Bottom Layer w0.2: DD4.3 ccw(c10.54,2.36) 10.5,2.36 10.5,1.1 ccw(c10.849,1.1) 10.849,0.751 18.051,0.751 ccw(c18.051,1.3) R15.2@18.6,1.3
NetDD4_5: DD4.5 R14.2 | length 15.3
  Bottom Layer w0.2: R14.2@4,-0.5 4.135,-0.5 6.435,1.799 ccw(c4.94,3.294) 7.054,3.294 7.054,4.4 cw(c8.874,4.4) 7.587,5.687 7.6,5.7 cw(c8.324,4.976) 8.324,6 9.948,6 cw(c9.948,3.46) 11.744,5.256 12.6,4.4 cw(c11.441,3.241) 13.08,3.241 DD4.5
NetDD4_6: DD4.6 R13.2 | length 15.2
  Bottom Layer w0.2: R13.2@4,1.2 6.176,3.376 ccw(c5.151,4.4) 6.6,4.4 ; 6.6,4.401 cw(c8.871,4.401) 7.265,6.007 7.281,6.023 cw(c8.322,4.982) 8.322,6.454 9.949,6.454 cw(c9.949,3.462) 12.064,5.578 13.719,3.923 cw(c12.196,2.4) DD4.6
NetR1_1: R1.1 VL1.2 | length 1.7
  Top Layer w0.2: R1.1 VL1.2
NetR2_1: R2.1 VL2.2 | length 1.7
  Top Layer w0.2: VL2.2 R2.1
NetR3_1: R3.1 VL3.2 | length 1.8
  Top Layer w0.2: VL3.2 R3.1
NetR13_1: R13.1 XS3.5 XS3.7 | length 7.8
  Top Layer w0.2: v1(2.398,2.127) 3.251,1.274 ccw(c4.6,2.624) 4.6,0.715 XS3.5 6.385,0.715 cw(c6.385,0.5) 6.6,0.5 6.6,-0.1 cw(c6.4,-0.1) 6.4,-0.3 5.675,-0.3 XS3.7 5.5,-0.285 XS3.7@5.5,-0.3
  Bottom Layer w0.2: v1(2.398,2.127) 2.4,2.125 R13.1
NetR14_1: R14.1 XS3.6 XS3.8 | length 7.2
  Top Layer w0.2: v1(2.371,-1.415) cw(c3.06,-1.415) 2.573,-0.927 3.5,0 cw(c4.02,-0.52) 4.02,0.215 4.6,0.215 ; XS3.8 4.785,-0.785 cw(c4.785,-0.6) 4.6,-0.6 4.6,0.215 ; XS3.6 4.6,0.215
  Bottom Layer w0.2: v1(2.371,-1.415) 2.371,-0.329 R14.1
NetR19_2: R19.2 R20.1 VT1.1 | length 3.4
  Bottom Layer w0.2: R19.2 54,-11.141 cw(c54.341,-11.141) R20.1 55.738,-10.9 cw(c55.738,-11.412) VT1.1
NetR21_1: R21.1 VT1.3 VT2.2 | length 2.2
  Top Layer w0.2: VT2.2 cw(c56.393,-9.272) 58.1,-9.272 R21.1
  other v1: 58.187,-10.132
NetR22_2: R22.2 XS3.4 | length 4.1
  Top Layer w0.2: v2(3.7,2.2) ccw(c4.674,2.2) 4.674,1.226 5.374,1.226 ccw(c5.385,1.226) 5.385,1.215 XS3.4
  Bottom Layer w0.2: R22.2 v2(3.7,2.2)
NetR23_2: R23.2 XS3.10 | length 3.4
  Top Layer w0.2: v2(3.814,-1.432) ccw(c4.642,-0.603) 4.642,-1.775 5.581,-1.775 ccw(c5.604,-1.751) 5.604,-1.785 XS3.10
  Bottom Layer w0.2: R23.2 v2(3.814,-1.432)
NetVT2_3: VT2.3 XS1.1 XS1.2
  other v1: 62.5,-2.6 64.181,-2.545 66,-2.5
OLED_VCC: A1.2 C10.2 C14.2 C15.1 C19.1 DA1.1 DA1.2 DA1.8 DD3.6 L3.1 XS3.2 XS3.11 | length 78
  Top Layer w0.4: XS3.11 5.942,-2.435 cw(c5.942,-2.658) 6.1,-2.5 ccw(c6.1,-0.356) 7.616,-1.872 7.844,-1.644 ; XS3.2 6.735,2.365 cw(c6.735,2) 7.1,2 7.1,0.152 ccw(c9.64,0.152) 7.844,-1.644 ; C14.2 14.3,-4.2 ; v1(57.687,2.201) cw(c57.564,2.201) 57.651,2.114 55.581,0.044 cw(c51.129,4.496) 51.129,-1.8 38.8,-1.8 ccw(c38.8,-2.522) 38.078,-2.522 38.078,-5.222 cw(c37.1,-5.222) 37.1,-6.2 33.8,-6.2 cw(c33.8,-5.478) 33.078,-5.478 33.078,-4.123 DA1.8 30.152,-4.1 cw(c30.152,-1.56) 28.356,-3.356 27.436,-2.436 ccw(c25.9,-3.973) C10.2 A1.2 21.014,-3.456 cw(c19.218,-1.66) 19.218,-4.2 14.3,-4.2 ; 7.844,-1.644 C15.1 14.3,-4.2
  Bottom Layer w0.4: v1(57.687,2.201) 58.323,2.837 cw(c59.2,1.959) 59.2,3.2 59.35,3.2 ccw(c59.35,4.05) DD3.6
  Bottom Layer w0.8: C19.1 cw(c9.134,-6.1) 7.837,-4.803 v1(7.997,-4.643) ; C19.1@7.7,-6.1 L3.1@9.417,-6.1
OSC_IN: BQ1.2 C11.2 DD1.19 | length 10.2
  Bottom Layer w0.2: DD1.19 45.723,-2.044 ccw(c47.383,-0.383) 47.383,-2.731 BQ1.2@50.4,-2.731 ; BQ1.2 cw(c52.236,-1.334) 52.285,-1.285 C11.2
OSC_OUT: BQ1.1 C9.2 DD1.20 | length 12.1
  Bottom Layer w0.2: DD1.20 cw(c43.93,-1.024) 43.977,-0.977 45.122,-2.122 cw(c43.387,-3.857) 45.84,-3.857 BQ1.1@45.84,-8.882 ; BQ1.1 47.137,-10.308 ccw(c47.6,-9.846) 47.6,-10.5 47.712,-10.612 cw(c47.659,-10.666) C9.2
PF6: DD1.8 R9.2 | length 4.3
  Top Layer w0.2: R9.2 cw(c40.12,2.266) 40.011,2.374 v1(40.885,3.249)
  Bottom Layer w0.2: v1(40.885,3.249) 40.756,3.56 cw(c42.334,3.56) 41.218,4.675 DD1.8
RESET: C2.1 DD1.18 R6.1 SB2.2 | length 19.1
  Top Layer w0.2: v1(42.3,0.5) 42.3,0.574 45.456,3.73 ccw(c43.66,5.526) 46.2,5.526 C2.1 47.9,8.3 47.9,8.2 51.1,8.2 52.9,8.2 R6.1
  Bottom Layer w0.2: v1(42.3,0.5) cw(c43.266,-0.466) 43.266,0.9 43.3,0.9 cw(c43.3,0.45) 43.618,0.768 DD1.18
SCK: DD1.3 DD2.6 | length 12.6
  Bottom Layer w0.2: DD1.3 41.664,8.656 cw(c43.46,6.86) 43.46,9.4 50.3,9.4 ccw(c50.3,9.9) 50.8,9.9 50.8,11.1 DD2.6
SCL: A1.3 DD1.42 R11.2 | length 15
  Top Layer w0.2: R11.2 A1.3
  Bottom Layer w0.2: A1.3 26.526,-2.056 ccw(c28.322,-0.26) 28.322,-2.8 32.676,-2.8 ccw(c32.676,-1.776) 33.4,-2.5 33.773,-2.127 ccw(c33.664,-2.018) DD1.42
SDA: A1.4 DD1.41 R10.2 | length 21.8
  Top Layer w0.2: R10.2 A1.4
  Bottom Layer w0.2: A1.4 ccw(c23.2,2.868) 22.534,3.534 22.1,3.1 ccw(c22.583,2.617) 21.9,2.617 21.9,1.3 ccw(c23.26,1.3) 22.298,0.339 ccw(c23.116,1.156) 23.116,0 23.214,0 cw(c23.214,-1.655) 24.385,-0.485 26.356,-2.456 ccw(c28.152,-0.66) 28.152,-3.2 32.976,-3.2 ccw(c32.976,-2.176) 33.7,-2.9 cw(c33.837,-2.9) 33.74,-2.803 DD1.41
SWCLK: DD1.32 XS2.3 | length 19.9
  Bottom Layer w0.2: XS2.3 24.5,-6.6 cw(c25.342,-6.6) 25.342,-5.758 31.188,-5.758 cw(c31.188,-8.822) 33.355,-6.655 33.6,-6.9 ccw(c34.774,-5.726) 34.774,-7.386 39.085,-7.386 ccw(c39.085,-5.855) 40.168,-6.938 ccw(c39.491,-6.261) 40.448,-6.261 ccw(c39.723,-6.261) 40.235,-5.748 DD1.32
SWDIO: DD1.31 XS2.2 | length 18.2
  Bottom Layer w0.2: XS2.2 27.04,-7.06 cw(c27.8,-7.06) 27.8,-6.3 31.048,-6.3 cw(c31.048,-8.84) 32.844,-7.044 33.1,-7.3 ccw(c34.549,-5.851) 34.549,-7.9 39.221,-7.9 ccw(c39.221,-6.001) 40.564,-7.344 ccw(c39.486,-6.266) 41.01,-6.266 ccw(c39.923,-6.266) 40.692,-5.497 DD1.31
UART1_RXD: DD1.57 R16.1 | length 15.9
  Bottom Layer w0.2: R16.1 cw(c20.1,3.359) 20.271,3.529 20.3,3.5 ccw(c20.3,4.098) 20.723,3.675 ccw(c18.071,6.327) 21.571,4.979 cw(c23.201,4.304) 21.953,5.552 cw(c25.338,2.167) 25.338,6.954 32.582,6.954 cw(c32.582,5.486) 33.619,6.524 DD1.57@34.14,6.003
UART1_TXD: DD1.56 R15.1 | length 17.8
  Bottom Layer w0.2: R15.1 cw(c18.8,2.6) 18.8,2.8 20.476,2.8 ccw(c20.476,3.335) 20.854,2.957 ccw(c18.345,5.466) 21.623,4.108 cw(c25.206,2.624) 25.158,6.501 32.329,6.501 cw(c32.329,5.037) 33.364,6.073 DD1.56
WAKEUP: DD1.17 R4.1 | length 6.6
  Top Layer w0.2: v1(46.2,0.5) 46.2,1.948 cw(c48.74,1.948) 46.944,3.744 v1(47.1,3.9)
  Bottom Layer w0.2: DD1.17 cw(c45.948,-0.854) 45.948,0.5 v1(46.2,0.5) ; v1(47.1,3.9) 47.817,3.9 cw(c47.817,3.217) R4.1 ; R4.1 ccw(c48.3,3.941) R4.1@48.444,3.747 ; R4.1 cw(c48.415,3.585) 48.415,3.747 R4.1@48.444,3.747 ; R4.1@48.444,3.747 ccw(c48.3,3.941) 48.47,3.77 48.447,3.747 R4.1@48.444,3.747
pads on no net: DD1.9 DD1.10 DD1.14 DD1.15 DD1.16 DD1.21 DD1.22 DD1.25 DD1.26 DD1.29 DD1.35 DD1.36 DD1.37 DD1.40 DD1.43 DD1.44 DD1.45 DD1.46 DD1.47 DD1.50 DD1.51 DD1.52 DD1.53 DD1.54 DD1.55 DD1.58 DD1.59 DD4.9 DD4.10 DD4.11 DD4.12 DD4.13 DD4.14 DD4.15 XS3.0 XS3.3 XS3.9

## Polygon pours and split planes (outlines as drawn)
MCU_GND on Top Layer "NONET_L-01_P-001" (solid, remove dead copper, pour order 6): -0.5,13.1 -0.5,-14.3 60.8,-14.3 60.8,13.3
OLED_VCC on Top Layer "NONET_L-01_P-001" (solid, pour order 4): 5.107,2.661 7.239,2.661 cw(c7.239,2.3) 7.6,2.3 7.6,-0.334 ccw(c8.966,-0.334) 8,-1.3 9.005,-2.305 ccw(c10.2,-1.11) 10.2,-2.8 13.548,-2.8 cw(c13.548,-5.34) 15.344,-3.544 19.8,-8 ccw(c21.49,-6.31) 21.49,-8.7 29.934,-8.7 ccw(c29.934,-7.334) 30.9,-8.3 31.505,-7.695 cw(c32.7,-8.89) 32.7,-7.2 34.1,-7.2 cw(c34.1,-7.7) 34.6,-7.7 34.6,-10.8 14.347,-10.8 cw(c11.72,-2.533) 5.071,-8.105 5.071,-6.059
GND on Top Layer "NONET_L-01_P-001" (solid, pour order 0): 0.613,-3.687 cw(c2.408,-5.483) 2.409,-2.943 6.435,-2.943 cw(c6.435,-3.607) 7.099,-3.607 7.099,-7.898 ccw(c8.595,-7.898) 8.594,-9.394 15.1,-9.4 15.22,-9.56 ccw(c18.1,-7.4) 18.1,-11 57.5,-11 ccw(c57.5,-9.6) 58.9,-9.6 58.9,2.1 cw(c60.4,2.1) 60.4,3.6 66.1,3.6 cw(c66.1,3) 66.7,3 66.7,2.004 cw(c66.155,2.003) 66.154,1.458 61.858,1.458 ccw(c61.858,0.6) 61,0.6 61,-11.9 cw(c59.706,-11.9) 59.706,-13.194 2.54,-13.2 cw(c2.54,-10.66) 0,-10.66 0,-4.3
NetC22_1 on Top Layer "NONET_L-01_P-001" (solid, pour order 2): 35.314,-9.059 35.314,-8.286 cw(c36.7,-8.286) 36.7,-6.9 ccw(c36.7,-5.8) 37.8,-5.8 37.8,-3.3 cw(c38.6,-3.3) 38.6,-2.5 57.2,-2.5 cw(c57.2,-4) 58.7,-4 58.7,-6.8 cw(c58.4,-6.8) 58.4,-7.1 40.2,-7.1 ccw(c40.2,-8.8) 38.5,-8.8 38.5,-9.1 cw(c37.6,-9.1) 37.6,-10 35.7,-10 cw(c35.7,-9.6) 35.3,-9.6
NetVT2_3 on Top Layer "NONET_L-01_P-001" (solid, pour order 3): 61.3,-2.4 cw(c62.1,-2.4) 62.1,-1.6 66.2,-1.6 cw(c66.2,-2.1) 66.7,-2.1 66.7,-8.3 cw(c66.1,-8.3) 66.1,-8.9 61.8,-8.9 cw(c61.8,-8.4) 61.3,-8.4
MCU_GND on Bottom Layer "NONET_L-01_P-001" (solid, remove dead copper, shelved, pour order 5): -1.2,14.2 -1.2,-8.1 30.7,-8.1 41.8,-8.1 47.2,-13.2 60.8,0.4 60.8,14.1

## Keep-outs
Keep-Out Layer:
  lines w0.254: -0.012,9.985 cw(c2.997,9.985) 2.997,12.994 ; -0.009,-10.191 ccw(c3,-10.191) 3,-13.2 63.997,-13.2 ; 0,-10.191 0,9.985 ; 2.997,13 63.985,13 ; 63.985,13.012 cw(c63.985,10.003) 66.994,10.003 ; 64.003,-13.194 ccw(c64.003,-10.185) 67.012,-10.185 ; 67,-10.185 67,10.003

## Text inside footprints (layer, text, board x,y; h text height)
A1: Top Overlay "SDA" at 21.3,4.679 h1 r180; Top Overlay "SCL" at 21.3,1.879 h1 r180; Top Overlay "Vcc" at 21.299,-0.72 h1 r180; Top Overlay "GND" at 21.3,-3.121 h1 r180